# EAGLE board OpenBook_board_final (EAGLE 9.7.0)
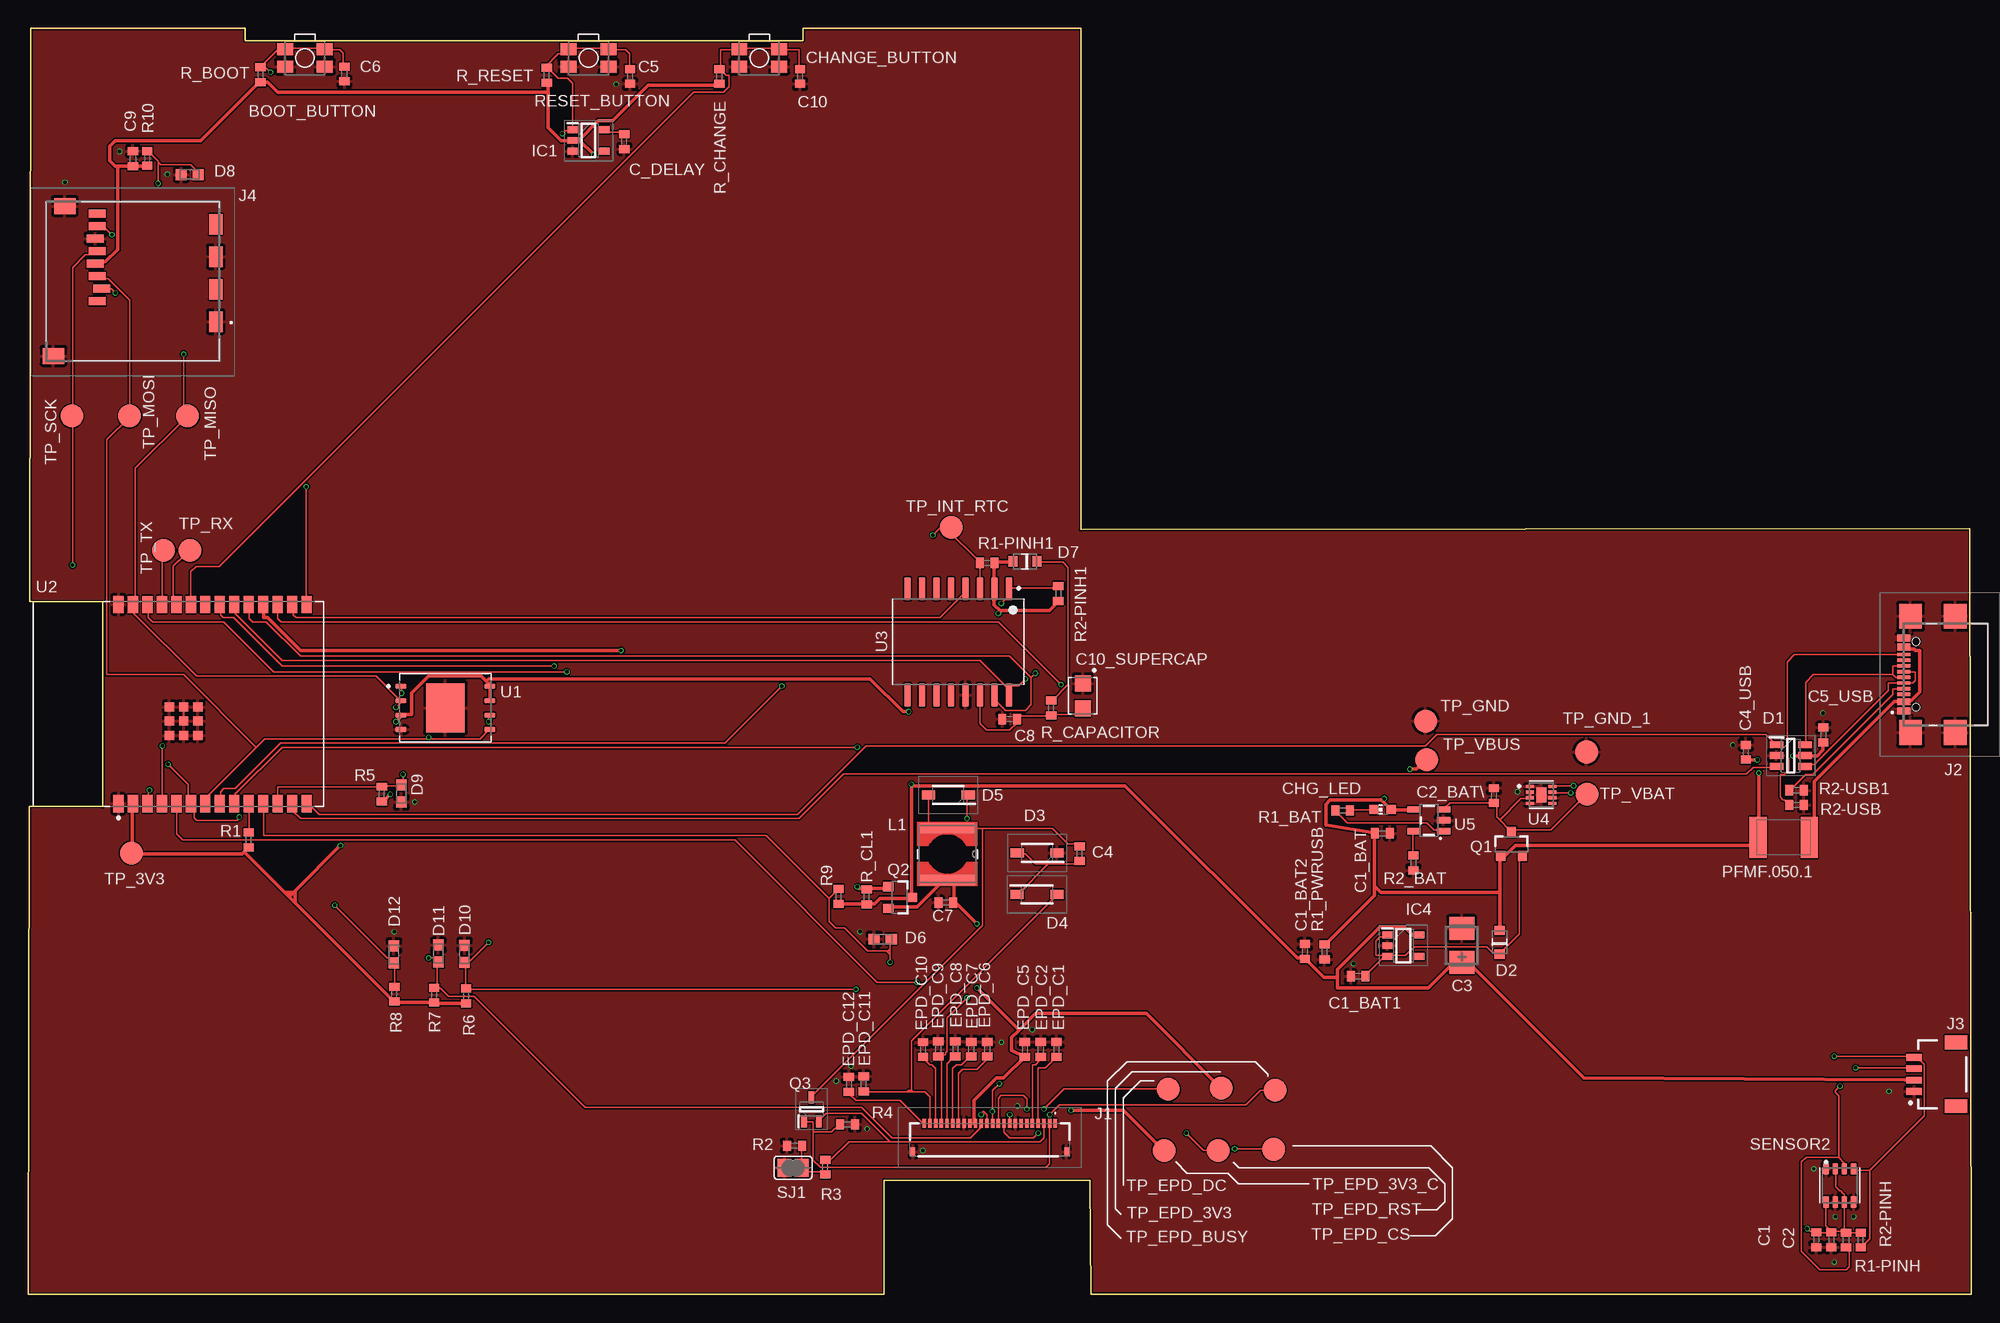
[diagram p0: board, top side]
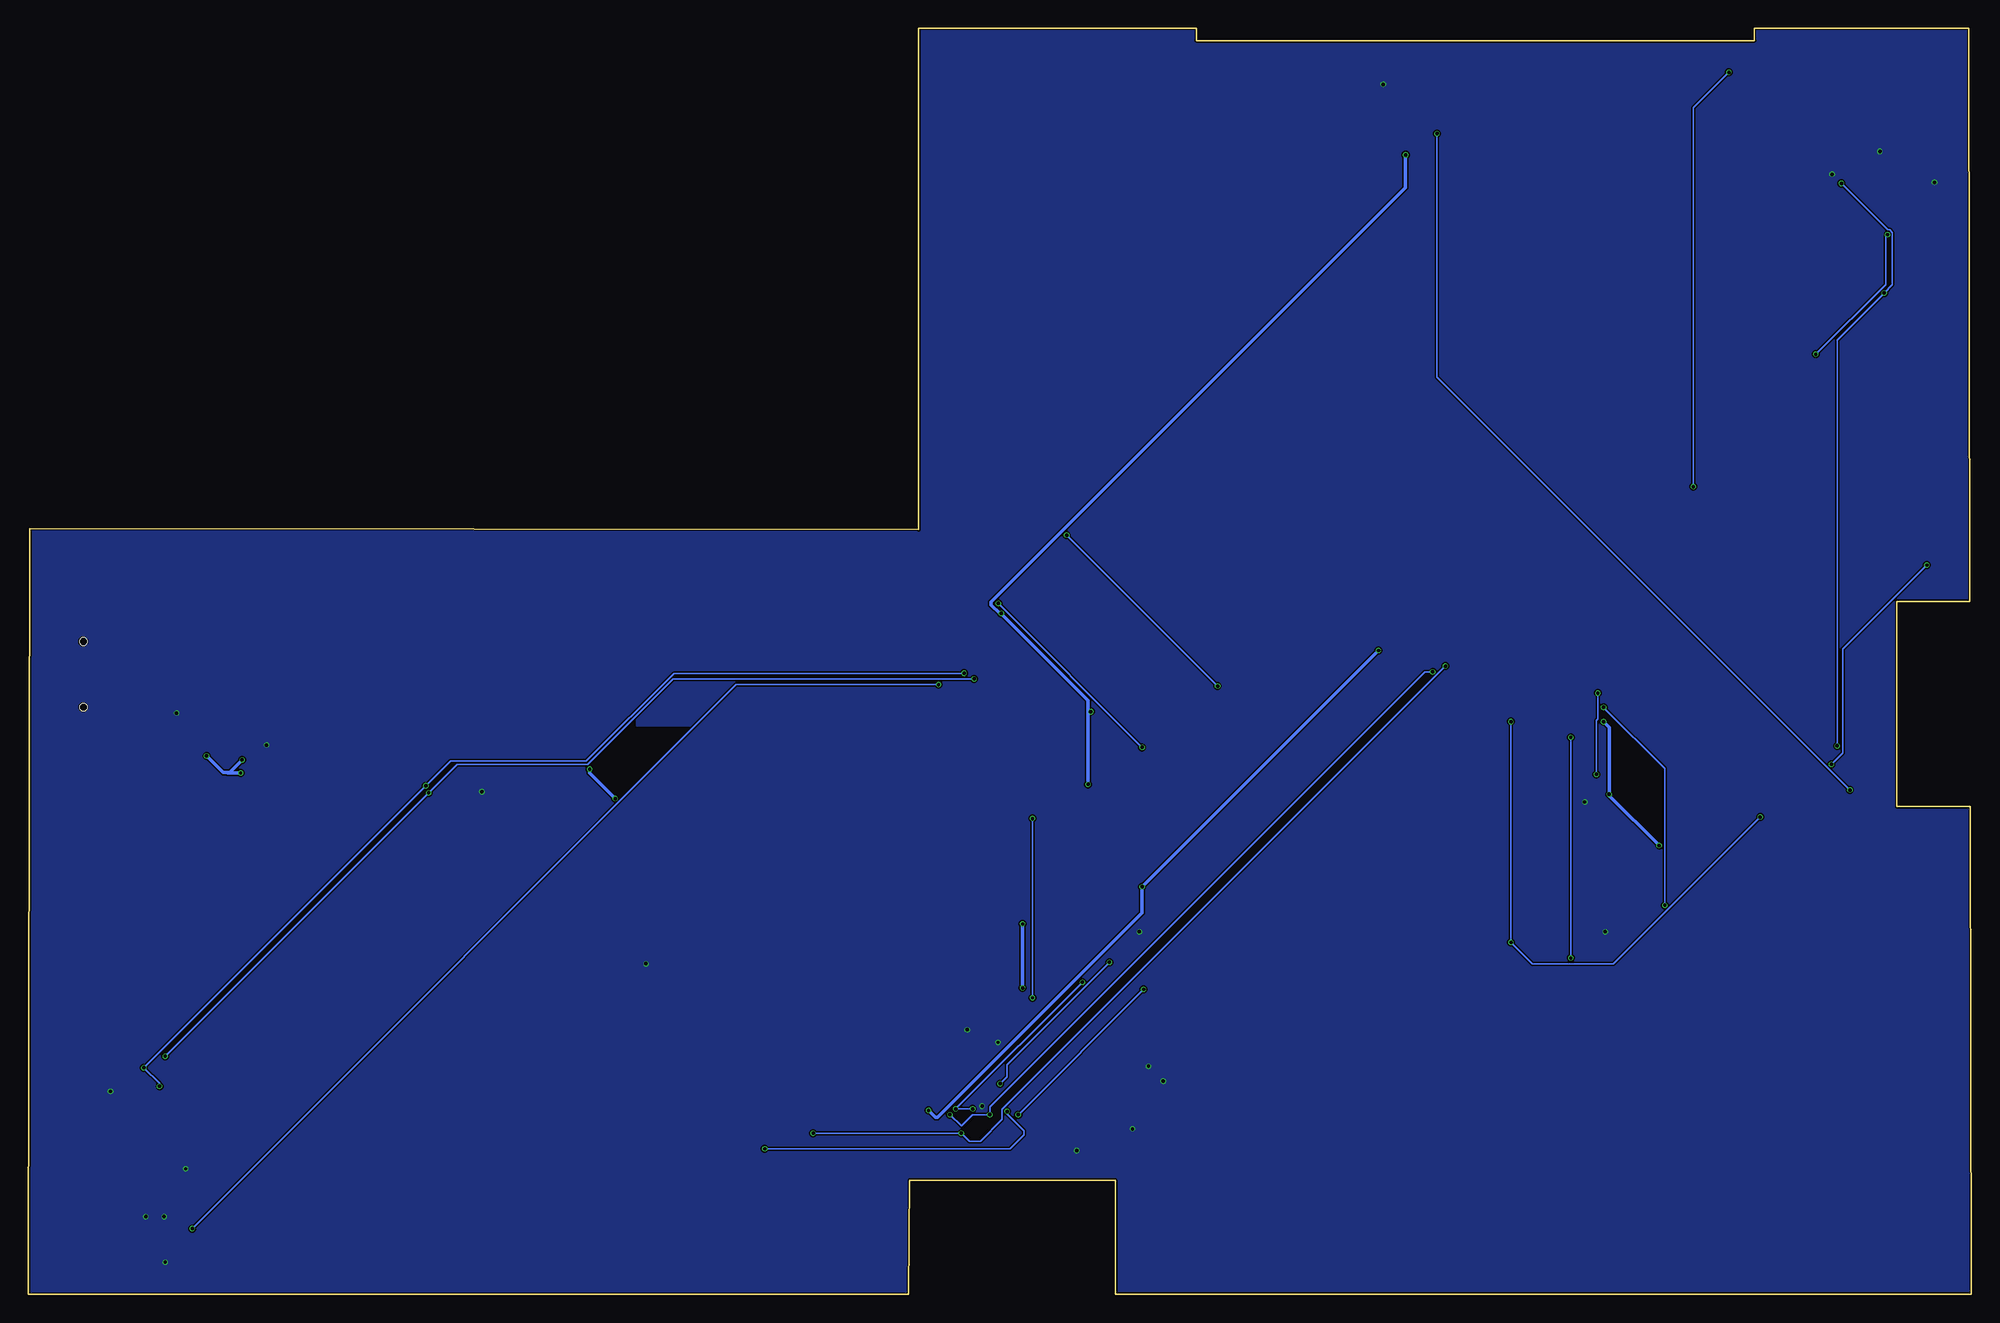
[diagram p1: board, bottom side, seen from below]

Size 170.5 x 111.1 mm. Coordinates in mm from the lower left corner, seen from the top.
Outline: 75.1,10 75.1,0 0,0 0.08,42.8 6.5,42.8 6.5,60.79 0.11,60.79 0.2,111.1 19,111.1 19,110.04 68,110.04 68,111.1 92.36,111.1 92.36,67.1 170.4,67.2 170.5,0 93.27,0 93.17,10 75.1,10
Copper layers (1*16): Top 0.035mm / dielectric 1.6mm / Bottom 0.035mm
Design rules "jlcpcb-2layers.dru *": minimum track width 0.15mm, minimum drill 0.3mm, track to track 5mil, track to pad 5mil, pad to pad 5mil, via to via 5mil, smd to smd 5mil, copper to edge 0.1mm, drill to drill 0.2mm, minimum pad ring 10mil, minimum via ring 3mil, stop-mask expansion 4mil, vias tented up to drill 0mil, thermal gap 10mil
Net classes: 1 POWER: width 0.3 mm

## Footprints (pad centres in the part's own frame; a part is rotated, then mirrored left to right if it is on the bottom)
MYBUTTON = smd 1.4 x 1.05: 1 1.75,0.75; 2 -1.75,0.75; 3 -1.75,-0.75; 4 1.75,-0.75
ESP32_WROVER_EAGLE-LTSPICE_C0402 = smd 0.7 x 0.9: 1 -0.65,0; 2 0.65,0
RCL_CT3528 = smd 2 x 2.2: + -1.5,0; - 1.5,0
CAPCP3225X100N = smd 1.4 x 1.4: 1 -1.1,0; 2 1.1,0
ADAFRUIT_CHIP-LED0603 = smd 0.8 x 0.8: A 0,-0.75; C 0,0.75
SOT95P280X145-6N = smd 1.2 x 0.6: 1 -1.25,0.95; 2 -1.25,0; 3 -1.25,-0.95; 4 1.25,-0.95; 5 1.25,0; 6 1.25,0.95
ESP32_WROVER_AVX---SD0805S020S1R0_AVX_SD0805S020S1R0_0 = smd 0.8 x 0.9: 1 -1.05,0; 2 1.05,0
SOD3716X135N = smd 1.15 x 0.8: 1 -1.75,0; 2 1.75,0
DIOC1608X36N = smd 0.97 x 0.94: 1 -0.75,0; 2 0.75,0
SOT95P280X125-5N = smd 0.9 x 0.6: 1 -1.4,0.95; 2 -1.4,0; 3 -1.4,-0.95; 4 1.4,-0.95; 5 1.4,0.95
SOT95P280X120-5N = smd 0.9 x 0.6: 1 -1.4,0.95; 2 -1.4,0; 3 -1.4,-0.95; 4 1.4,-0.95; 5 1.4,0.95
FH34SRJ24S05SH99 = smd 0.3 x 0.8: 1 5.75,1.45; 2 5.25,1.45; 3 4.75,1.45; 4 4.25,1.45; 5 3.75,1.45; 6 3.25,1.45; 7 2.75,1.45; 8 2.25,1.45; 9 1.75,1.45; 10 1.25,1.45; 11 0.75,1.45; 12 0.25,1.45; 13 -0.25,1.45; 14 -0.75,1.45; 15 -1.25,1.45; 16 -1.75,1.45; 17 -2.25,1.45; 18 -2.75,1.45; 19 -3.25,1.45; 20 -3.75,1.45; 21 -4.25,1.45; 22 -4.75,1.45; 23 -5.25,1.45; 24 -5.75,1.45 | smd 0.4 x 0.8: MP1 6.75,-1.05; MP2 -6.75,-1.05
SAMACSYS_PARTS_USB4110GFA = smd 0.3 x 1.15: A1 -3.35,3.678; A4 -2.55,3.678; A5 -1.25,3.678; A6 -0.25,3.678; A7 0.25,3.678; A8 1.25,3.678; A9 2.55,3.678; A12 3.35,3.678; B1 3.05,3.678; B4 2.25,3.678; B5 1.75,3.678; B6 0.75,3.678; B7 -0.75,3.678; B8 -1.75,3.678; B9 -2.25,3.678; B12 -3.05,3.678 | smd 2.18 x 2: MP1 -5.11,-0.827; MP2 5.11,-0.827; MP3 -5.11,3.103; MP4 5.11,3.103 | hole 0.65: -2.89,2.603; 2.89,2.603
JST04_1MM_RA = smd 0.6 x 1.35: 1 -1.5,0; 2 -0.5,0; 3 0.5,0; 4 1.5,0 | smd 1.2 x 2: NC1 2.8,-3.675; NC2 -2.8,-3.675
112ATAARR03ATTEND = smd 1.8 x 1.2: G1 10.6,10.4; G2 4.9,10.4; S1 7.75,10.4; S2 2.05,10.4 | smd 1.4 x 1.9: G3 13.6,-3.85; G4 0.45,-2.85 | smd 0.7 x 1.5: P1 8.8,0; P2 7.7,0.4; P3 6.6,0; P4 5.5,-0.2; P5 4.4,0; P6 3.3,-0.2; P7 2.2,0; P8 1.1,0
IND_4828-WE-TPC_WRE = smd 0.889 x 4.826: 1 -2.286,0; 2 2.286,0
ESP32C6_VARISTOR_CT/CN1812 = smd 1.5 x 3.6: 1 -2.25,0; 2 2.25,0
ESP32_WROVER_SPARKFUN-DISCRETESEMI_SOT23-3 = smd 0.8 x 0.9: 1 -0.95,-1; 2 0.95,-1; 3 0,1.1
SOT65P210X110-3N = smd 1.05 x 0.5: 1 -1.05,0.65; 2 -1.05,-0.65; 3 1.05,0
ESP32_WROVER_EAGLE-LTSPICE_R0402 = smd 0.7 x 0.9: 1 -0.65,0; 2 0.65,0
ESP32_WROVER_BME680_PSON80P300X300X100-8N = smd 1.016 x 0.5: 1 1.458,1.2; 2 1.458,0.4; 3 1.458,-0.4; 4 1.458,-1.2; 5 -1.458,-1.22; 6 -1.458,-0.4; 7 -1.458,0.4; 8 -1.458,1.2
SJ = smd 1.168 x 1.6: 1 -0.762,0; 2 0.762,0
TP20R = smd 2 x 2: TP 0,0
SON127P600X800X80-9N = smd 0.94 x 0.44: 1 -3.895,1.905; 2 -3.895,0.635; 3 -3.895,-0.635; 4 -3.895,-1.905; 5 3.895,-1.905; 6 3.895,-0.635; 7 3.895,0.635; 8 3.895,1.905 | smd 3.4 x 4.3: 9 0,0
XCVR_ESP32-C6-WROOM-1-N8 = smd 1.5 x 0.9: 1 -8.75,5.26; 2 -8.75,3.99; 3 -8.75,2.72; 4 -8.75,1.45; 5 -8.75,0.18; 6 -8.75,-1.09; 7 -8.75,-2.36; 8 -8.75,-3.63; 9 -8.75,-4.9; 10 -8.75,-6.17; 11 -8.75,-7.44; 12 -8.75,-8.71; 13 -8.75,-9.98; 14 -8.75,-11.25; 15 8.75,-11.25; 16 8.75,-9.98; 17 8.75,-8.71; 18 8.75,-7.44; 19 8.75,-6.17; 20 8.75,-4.9; 21 8.75,-3.63; 22 8.75,-2.36; 23 8.75,-1.09; 24 8.75,0.18; 25 8.75,1.45; 26 8.75,2.72; 27 8.75,3.99; 28 8.75,5.26 | smd 0.8 x 0.8: 29_1 -2.755,0.79; 29_2 -1.505,0.79; 29_3 -0.255,0.79; 29_4 -2.755,-0.46; 29_5 -1.505,-0.46; 29_6 -0.255,-0.46; 29_7 -2.755,-1.71; 29_8 -1.505,-1.71; 29_9 -0.255,-1.71
SOIC127P1032X265-16N = smd 2.05 x 0.59: 1 -4.655,4.445; 2 -4.655,3.175; 3 -4.655,1.905; 4 -4.655,0.635; 5 -4.655,-0.635; 6 -4.655,-1.905; 7 -4.655,-3.175; 8 -4.655,-4.445; 9 4.655,-4.445; 10 4.655,-3.175; 11 4.655,-1.905; 12 4.655,-0.635; 13 4.655,0.635; 14 4.655,1.905; 15 4.655,3.175; 16 4.655,4.445
SON50P200X200X80-9N = smd 0.76 x 0.27: 1 -0.985,0.75; 2 -0.985,0.25; 3 -0.985,-0.25; 4 -0.985,-0.75; 5 0.985,-0.75; 6 0.985,-0.25; 7 0.985,0.25; 8 0.985,0.75 | smd 0.9 x 1.3: 9 0,0
ESP32_WROVER_SPARKFUN-IC-POWER_SOT23-5 = smd 0.55 x 1.2: 1 -0.95,-1.3; 2 0,-1.3; 3 0.95,-1.3; 4 0.95,1.3; 5 -0.95,1.3

## Placement (x,y rotation side)
BOOT_BUTTON  BUTTON_CUSYOMV1  [MYBUTTON]  24.27,108.51 180 top
C1  100nF  [ESP32_WROVER_EAGLE-LTSPICE_C0402]  158.23,4.76 270 top
C1_BAT  4.7uF  [ESP32_WROVER_EAGLE-LTSPICE_C0402]  118.84,40.45 0 top
C1_BAT1  4.7uF  [ESP32_WROVER_EAGLE-LTSPICE_C0402]  116.71,27.91 180 top
C1_BAT2  4.7uF  [ESP32_WROVER_EAGLE-LTSPICE_C0402]  112.03,30.08 90 top
C2  100nF  [ESP32_WROVER_EAGLE-LTSPICE_C0402]  156.93,4.78 270 top
C2_BAT\  4.7uF  [ESP32_WROVER_EAGLE-LTSPICE_C0402]  128.63,43.76 90 top
C3  100uF TANT  [RCL_CT3528]  125.8,30.61 90 top
C4  4.7uF/25V  [ESP32_WROVER_EAGLE-LTSPICE_C0402]  92.26,38.66 90 top
C4_USB  100nF  [ESP32_WROVER_EAGLE-LTSPICE_C0402]  150.73,47.57 90 top
C5  1uF  [ESP32_WROVER_EAGLE-LTSPICE_C0402]  52.81,106.88 270 top
C5_USB  4.7μF  [ESP32_WROVER_EAGLE-LTSPICE_C0402]  157.53,49.08 90 top
C6  100nF  [ESP32_WROVER_EAGLE-LTSPICE_C0402]  27.73,107.1 270 top
C7  10uF  [ESP32_WROVER_EAGLE-LTSPICE_C0402]  80.51,34.37 180 top
C8  100nF  [ESP32_WROVER_EAGLE-LTSPICE_C0402]  86.12,50.47 180 top
C9  100nF  [ESP32_WROVER_EAGLE-LTSPICE_C0402]  9.17,99.66 90 top
C10  100nF  [ESP32_WROVER_EAGLE-LTSPICE_C0402]  67.73,106.88 270 top
C10_SUPERCAP  CPH3225A""  [CAPCP3225X100N]  92.54,52.51 270 top
C_DELAY  100nF  [ESP32_WROVER_EAGLE-LTSPICE_C0402]  52.29,101.17 270 top
CHANGE_BUTTON  BUTTON_CUSYOMV1  [MYBUTTON]  64.14,108.51 180 top
CHG_LED  [ADAFRUIT_CHIP-LED0603]  118.85,42.54 90 top
D1  USBLC6-2SC6Y  [SOT95P280X145-6N]  154.68,47.27 0 top
D2  ESP32_WROVER_AVX---SD0805S020S1R0_AVX_SD0805S020S1R0_0_0AVX_SD0805S020S1R0_0_0  [ESP32_WROVER_AVX---SD0805S020S1R0_AVX_SD0805S020S1R0_0]  129.12,30.89 90 top
D3  MBR0530  [SOD3716X135N]  88.54,38.73 180 top
D4  MBR0530  [SOD3716X135N]  88.52,35.08 0 top
D5  MBR0530  [SOD3716X135N]  80.74,43.82 180 top
D6  PGB1010603MR  [DIOC1608X36N]  74.98,31.17 0 top
D7  ESP32_WROVER_AVX---SD0805S020S1R0_AVX_SD0805S020S1R0_0_0AVX_SD0805S020S1R0_0_0  [ESP32_WROVER_AVX---SD0805S020S1R0_AVX_SD0805S020S1R0_0]  87.46,64.32 180 top
D8  PGB1010603MR  [DIOC1608X36N]  14.16,98.27 0 top
D9  PGB1010603MR  [DIOC1608X36N]  32.73,43.94 90 top
D10  PGB1010603MR  [DIOC1608X36N]  38.27,29.88 270 top
D11  PGB1010603MR  [DIOC1608X36N]  35.97,29.9 270 top
D12  PGB1010603MR  [DIOC1608X36N]  32.07,29.82 270 top
EPD_C1  1uF/50V  [ESP32_WROVER_EAGLE-LTSPICE_C0402]  90.23,21.49 90 top
EPD_C2  1uF/50V  [ESP32_WROVER_EAGLE-LTSPICE_C0402]  88.85,21.48 90 top
EPD_C5  1uF/50V  [ESP32_WROVER_EAGLE-LTSPICE_C0402]  87.45,21.49 90 top
EPD_C6  1uF/50V  [ESP32_WROVER_EAGLE-LTSPICE_C0402]  84.15,21.5 90 top
EPD_C7  1uF/50V  [ESP32_WROVER_EAGLE-LTSPICE_C0402]  82.75,21.51 90 top
EPD_C8  1uF/50V  [ESP32_WROVER_EAGLE-LTSPICE_C0402]  81.35,21.52 90 top
EPD_C9  1uF/50V  [ESP32_WROVER_EAGLE-LTSPICE_C0402]  79.85,21.53 90 top
EPD_C10  1uF/50V  [ESP32_WROVER_EAGLE-LTSPICE_C0402]  78.51,21.47 90 top
EPD_C11  1uF/50V  [ESP32_WROVER_EAGLE-LTSPICE_C0402]  73.31,18.45 90 top
EPD_C12  1uF/50V  [ESP32_WROVER_EAGLE-LTSPICE_C0402]  72.01,18.41 90 top
IC1  BD5229G-TR""  [SOT95P280X125-5N]  49.15,101.27 0 top
IC4  XC6220A331MR-G  [SOT95P280X120-5N]  120.68,30.59 0 top
J1  FH34SRJ-24S-0.5SH_99_  [FH34SRJ24S05SH99]  84.37,13.54 0 top
J2  SAMACSYS_PARTS_USB4110-GF-A  [SAMACSYS_PARTS_USB4110GFA]  168.29,54.4 90 top
J3  QWIIC_RIGHT_ANGLE  [JST04_1MM_RA]  165.5,19.29 90 top
J4  112A-TAAR-R03_ATTEND""  [112ATAARR03ATTEND]  6.04,95.95 270 top
L1  68uH  [IND_4828-WE-TPC_WRE]  80.65,38.63 270 top
PFMF.050.1  ESP32C6_VARISTORCN1812  [ESP32C6_VARISTOR_CT/CN1812]  154.06,40.1 180 top
Q1  20V/4.2A/52mΩ/1.4W  [ESP32_WROVER_SPARKFUN-DISCRETESEMI_SOT23-3]  130.16,39.46 0 top
Q2  20V/4.2A/52mΩ/1.4W  [ESP32_WROVER_SPARKFUN-DISCRETESEMI_SOT23-3]  76.46,34.82 270 top
Q3  SI1308EDL-T1-GE3  [SOT65P210X110-3N]  68.72,16.23 90 top
R1  10K  [ESP32_WROVER_EAGLE-LTSPICE_R0402]  19.33,39.87 270 top
R1-PINH  10K  [ESP32_WROVER_EAGLE-LTSPICE_R0402]  159.53,4.74 90 top
R1-PINH1  10K  [ESP32_WROVER_EAGLE-LTSPICE_R0402]  84.15,64.19 0 top
R1_BAT  200  [ESP32_WROVER_EAGLE-LTSPICE_R0402]  115.35,42.45 0 top
R1_PWRUSB  100K  [ESP32_WROVER_EAGLE-LTSPICE_R0402]  113.76,30.05 90 top
R2  2.2  [ESP32_WROVER_EAGLE-LTSPICE_R0402]  67.23,13.01 0 top
R2-PINH  10K  [ESP32_WROVER_EAGLE-LTSPICE_R0402]  160.83,4.75 90 top
R2-PINH1  10K  [ESP32_WROVER_EAGLE-LTSPICE_R0402]  90.39,61.51 270 top
R2-USB  5k1  [ESP32_WROVER_EAGLE-LTSPICE_R0402]  155.18,42.93 0 top
R2-USB1  5k1  [ESP32_WROVER_EAGLE-LTSPICE_R0402]  155.18,44.23 180 top
R2_BAT  2K  [ESP32_WROVER_EAGLE-LTSPICE_R0402]  121.55,37.86 90 top
R3  10K  [ESP32_WROVER_EAGLE-LTSPICE_R0402]  69.93,11.15 270 top
R4  10K  [ESP32_WROVER_EAGLE-LTSPICE_R0402]  71.89,14.91 0 top
R5  10K  [ESP32_WROVER_EAGLE-LTSPICE_R0402]  31.01,43.89 270 top
R6  10K  [ESP32_WROVER_EAGLE-LTSPICE_R0402]  38.41,26.17 270 top
R7  10K  [ESP32_WROVER_EAGLE-LTSPICE_R0402]  35.61,26.25 270 top
R8  10K  [ESP32_WROVER_EAGLE-LTSPICE_R0402]  32.11,26.33 270 top
R9  10K  [ESP32_WROVER_EAGLE-LTSPICE_R0402]  71.11,34.91 270 top
R10  10K  [ESP32_WROVER_EAGLE-LTSPICE_R0402]  10.43,99.69 270 top
R_BOOT  10K  [ESP32_WROVER_EAGLE-LTSPICE_R0402]  20.37,107.05 270 top
R_CAPACITOR  15  [ESP32_WROVER_EAGLE-LTSPICE_R0402]  89.76,51.45 90 top
R_CHANGE  10K  [ESP32_WROVER_EAGLE-LTSPICE_R0402]  60.64,106.88 270 top
R_CL1  10K  [ESP32_WROVER_EAGLE-LTSPICE_R0402]  73.57,34.86 90 top
R_RESET  10K  [ESP32_WROVER_EAGLE-LTSPICE_R0402]  45.49,106.99 270 top
RESET_BUTTON  BUTTON_CUSYOMV1  [MYBUTTON]  49.15,108.51 180 top
SENSOR2  ESP32_WROVER_BME680_BME680""  [ESP32_WROVER_BME680_PSON80P300X300X100-8N]  158.98,9.54 90 top
SJ1  [SJ]  67.11,11.09 0 top
TP_3V3  TPTP20R  [TP20R]  9.03,38.71 0 top
TP_EPD_3V3  TPTP20R  [TP20R]  104.69,18.09 0 top
TP_EPD_3V3_C  TPTP20R  [TP20R]  99.68,12.61 0 top
TP_EPD_BUSY  TPTP20R  [TP20R]  109.42,17.89 0 top
TP_EPD_CS  TPTP20R  [TP20R]  109.28,12.71 0 top
TP_EPD_DC  TPTP20R  [TP20R]  100.04,17.99 0 top
TP_EPD_RST  TPTP20R  [TP20R]  104.43,12.61 0 top
TP_GND  TPTP20R  [TP20R]  122.62,50.29 0 top
TP_GND_1  TPTP20R  [TP20R]  136.74,47.59 0 top
TP_INT_RTC  TPTP20R  [TP20R]  80.98,67.31 0 top
TP_MISO  TPTP20R  [TP20R]  13.96,77.09 0 top
TP_MOSI  TPTP20R  [TP20R]  8.88,77.09 0 top
TP_RX  TPTP20R  [TP20R]  14.18,65.29 0 top
TP_SCK  TPTP20R  [TP20R]  3.8,77.09 0 top
TP_TX  TPTP20R  [TP20R]  11.86,65.29 0 top
TP_VBAT  TPTP20R  [TP20R]  136.8,43.89 0 top
TP_VBUS  TPTP20R  [TP20R]  122.73,46.91 0 top
U1  W25Q512JVEIQ  [SON127P600X800X80-9N]  36.59,51.46 0 top
U2  ESP32-C6-WROOM-1-N8""  [XCVR_ESP32-C6-WROOM-1-N8]  13.16,51.8 90 top
U3  DS3231SN#""  [SOIC127P1032X265-16N]  81.6,57.25 270 top
U4  MAX17048G+T10  [SON50P200X200X80-9N]  132.78,43.82 0 top
U5  MCP73831  [ESP32_WROVER_SPARKFUN-IC-POWER_SOT23-5]  122.91,41.59 90 top

## Library data of the parts
BOOT_BUTTON C1 C1_BAT C1_BAT1 C1_BAT2 C2 C2_BAT\ C3 C4 C4_USB C5 C5_USB C6-C10 C10_SUPERCAP C_DELAY CHANGE_BUTTON CHG_LED D1-D12 EPD_C1 EPD_C2 EPD_C5-EPD_C12 IC1 IC4 J1-J4 L1 PFMF.050.1 Q3 R1 R1-PINH R1-PINH1 R1_BAT R1_PWRUSB R2 R2-PINH R2-PINH1 R2-USB R2-USB1 R2_BAT R3-R10 R_BOOT R_CAPACITOR R_CHANGE R_CL1 R_RESET RESET_BUTTON SENSOR2 SJ1 TP_3V3 TP_EPD_3V3 TP_EPD_3V3_C TP_EPD_BUSY TP_EPD_CS TP_EPD_DC TP_EPD_RST TP_GND TP_GND_1 TP_INT_RTC TP_MISO TP_MOSI TP_RX TP_SCK TP_TX TP_VBAT TP_VBUS U1-U5 = openbook schematic
Q1 Q2 = openbook schematic; PARTNAME: DMG2305UX-7

## Nets
3V3 [POWER]: C1_BAT2.1 C3.+ C9.1 D7.2 IC1.2 IC4.5 J3.2 J4.P4 Q2.3 R1-PINH1.2 R1.2 R2-PINH1.2 R5.2 R6.2 R7.2 R8.2 R9.2 R10.2 R_BOOT.2 R_CHANGE.2 R_CL1.1 R_RESET.2 TP_3V3.TP U1.3 U1.7 U1.8 U2.2 U3.2
32KHZ: R2-PINH1.1 U2.9 U3.1
DN: D1.4 J2.A7 J2.B7
DP: D1.6 J2.A6 J2.B6
EPD_3V3 [POWER]: C7.1 EPD_C5.1 J1.15 J1.16 L1.2 Q2.2 TP_EPD_3V3.TP
EPD_3V3_C [POWER]: Q2.1 R_CL1.2 TP_EPD_3V3_C.TP U2.18
EPD_BUSY: J1.9 TP_EPD_BUSY.TP U2.26
EPD_CS: D6.2 J1.12 R9.1 TP_EPD_CS.TP U2.11
EPD_DC: J1.11 TP_EPD_DC.TP U2.5
EPD_RST: J1.10 TP_EPD_RST.TP U2.21
FLASH_CS: D9.2 R5.1 U1.1 U2.12
GDR: J1.2 Q3.1 R4.1
GND: BOOT_BUTTON.1 BOOT_BUTTON.2 C1.2 C1_BAT1.2 C1_BAT2.2 C1_BAT.2 C2.2 C2_BAT\.2 C3.- C4_USB.2 C5.2 C5_USB.2 C6.2 C7.2 C8.2 C9.2 C10.2 C10_SUPERCAP.1 C_DELAY.2 CHANGE_BUTTON.1 CHANGE_BUTTON.2 D1.2 D3.1 D6.1 D8.1 D9.1 D10.1 D11.1 D12.1 EPD_C1.2 EPD_C2.2 EPD_C5.2 EPD_C6.2 EPD_C7.2 EPD_C8.2 EPD_C9.2 EPD_C10.2 EPD_C11.2 EPD_C12.2 IC1.3 IC4.2 J1.8 J1.17 J1.MP1 J1.MP2 J2.A1 J2.A12 J2.B1 J2.B12 J2.MP1 J2.MP2 J2.MP3 J2.MP4 J3.1 J4.G1 J4.G2 J4.G3 J4.G4 J4.P6 R1_PWRUSB.1 R2-USB1.1 R2-USB.2 R2.1 R2_BAT.1 R4.2 RESET_BUTTON.1 RESET_BUTTON.2 SENSOR2.1 SENSOR2.5 SENSOR2.7 SJ1.1 TP_GND.TP TP_GND_1.TP U1.4 U1.9 U2.1 U2.28 U2.29_1 U2.29_2 U2.29_3 U2.29_4 U2.29_5 U2.29_6 U2.29_7 U2.29_8 U2.29_9 U3.13 U4.1 U4.4 U4.6 U4.9 U5.2
I2C_PW: C1.1 C2.1 R1-PINH.2 R2-PINH.2 SENSOR2.2 SENSOR2.6 SENSOR2.8 U2.17
INT_RTC: R1-PINH1.1 TP_INT_RTC.TP U2.8 U3.3
IO/BOOT: BOOT_BUTTON.3 BOOT_BUTTON.4 C6.1 R_BOOT.1 U2.15
IO/CHANGE: C10.1 CHANGE_BUTTON.3 CHANGE_BUTTON.4 R_CHANGE.1 U2.23
MISO: D12.2 J4.P7 R8.1 TP_MISO.TP U1.2 U2.27
MOSI: D11.2 J1.14 J4.P3 R7.1 TP_MOSI.TP U1.5 U2.7
N$1: J2.B5 R2-USB.1
N$2: C1_BAT1.1 D2.1 IC4.1 IC4.3 Q1.2
N$3: R1.1 U2.10
N$4: D7.1 R_CAPACITOR.2
N$5: EPD_C1.1 J1.4
N$6: J2.A5 R2-USB1.2
N$7: EPD_C2.1 J1.5
N$8: EPD_C6.1 J1.18
N$9: EPD_C7.1 J1.19
N$10: EPD_C8.1 J1.20
N$11: C_DELAY.1 IC1.5
N$12: EPD_C10.1 J1.22
N$13: C4.1 D3.2 D4.1
N$14: EPD_C12.1 J1.24
N$15: R1_BAT.1 U5.1
N$16: CHG_LED.C R1_BAT.2
N$18: R2_BAT.2 U5.5
PREVGH: D5.1 EPD_C9.1 J1.21
PREVGL: D4.2 EPD_C11.1 J1.23
RESE: J1.3 Q3.2 R3.1
RESE': R2.2 R3.2 SJ1.2
RESET: C5.1 IC1.1 R_RESET.1 RESET_BUTTON.3 RESET_BUTTON.4 U2.3
RTC_RST: U2.16 U3.4
RX: TP_RX.TP U2.24
SCK: D10.2 J1.13 J4.P5 R6.1 TP_SCK.TP U1.6 U2.6
SCL: J3.4 R2-PINH.1 SENSOR2.4 U2.20 U3.16 U4.7
SDA: J3.3 R1-PINH.1 SENSOR2.3 U2.19 U3.15 U4.8
SRC: C4.2 D5.2 L1.1 Q3.3
SS_SD: D8.2 J4.P2 R10.1 U2.4
TX: TP_TX.TP U2.25
USB_D+: D1.1 U2.14
USB_D-: D1.3 U2.13
VBAT: C2_BAT\.1 Q1.3 TP_VBAT.TP U4.2 U4.3 U5.3
VBUS [POWER]: C1_BAT.1 C4_USB.1 C5_USB.1 CHG_LED.A D1.5 D2.2 PFMF.050.1.2 Q1.1 R1_PWRUSB.2 TP_VBUS.TP U5.4
VRTC: C8.1 C10_SUPERCAP.2 R_CAPACITOR.1 U3.14
VUSB [POWER]: J2.A4 J2.A9 J2.B4 J2.B9 PFMF.050.1.1

## Tracks (layer width: path | path; a pad name or v marks a point on that pad's centre or on a via)
3V3  (via drill 0.3)
  Top 0.3: 45.62,105.5 45.62,106.25 45.5,106.25 R_RESET.2 | 45.62,105.5 45.62,102.38 46.75,101.25 47.75,101.25 IC1.2 47.88,101.25 48.25,101.25 48.31,101.31 | 48.31,101.31 50,103 51.25,103 54.38,106.12 60.62,106.12 R_CHANGE.2 | R10.2 10.38,99 9.25,99 C9.1 9.16,99.03 7.83,99.03 | 7.83,99.03 7.6,99.03 7.12,99.5 7.12,100.78 7.6,101.25 15.12,101.25 20.25,106.38 R_BOOT.2 20.5,106.38 21,106.38 21.88,105.5 45.62,105.5 | 7.83,99.03 7.83,91.7 6.75,90.62 6,90.62 5.88,90.5 J4.P4 | U1.7 40.5,52.12 40.5,53.25 U1.8 40.5,53.5 40.19,53.81 | v31.75,43.88 31.12,43.25 R5.2 | v32.25,50.25 32.75,50.75 U1.3 32.75,50.88 33.62,50.88 33.62,52.75 35.12,54.25 39.75,54.25 40.19,53.81 | R6.2 38.38,25.5 35.62,25.5 R7.2 35.5,25.62 32.12,25.62 R8.2 32,25.75 23.4,34.35 | 18.94,38.81 18.75,38.62 9.12,38.62 TP_3V3.TP 9.12,38.75 9.12,43 U2.2 | 18.94,38.81 19.25,39.12 R1.2 | 18.94,38.81 22.48,35.27 | 22.48,35.27 22.81,34.94 | 22.81,34.94 23.4,34.35 | 23.27,35.27 23,35 22.88,35 22.81,34.94 | 23.4,35.4 v27.38,39.38 | R9.2 71.12,34.25 73.5,34.25 R_CL1.1 73.62,34.25 74.25,34.25 74.75,34.75 77.5,34.75 Q2.3 77.5,34.88 v77.5,44.75 77.62,44.62 96.25,44.62 111.38,29.5 112,29.5 C1_BAT2.1 112.12,29.38 113.7,27.8 114.88,27.8 | D7.2 86.38,64.25 84.88,64.25 R1-PINH1.2 84.75,64.12 84.75,62 U3.2 84.75,61.88 84.75,60.5 85.25,60 | 85.25,60 89.62,60 90.38,60.75 R2-PINH1.2 | v85.12,59.75 85.25,59.88 85.25,60 | IC4.5 122,31.5 121.5,31.5 120.75,32.25 118.62,32.25 114.88,28.5 114.88,27.8 | J3.2 164.7,18.79 136.5,19 126.5,29 125.88,29 C3.+ 125.75,29 125,29 122.88,26.88 114.88,26.88 114.88,27.8 | 40.19,53.81 40.38,54 73.88,54 76.75,51.12 v77.25,51.12
  Top 0.3: v49.62,100 48.31,101.31 | 22.48,35.27 23.27,35.27 | 23.27,35.27 23.4,35.4 | 23.4,34.35 23.4,35.4
  Bottom 0.3: v32.25,50.25 31.75,49.75 v31.75,43.88 31.75,43.75 v27.38,39.38 | 77.5,51.12 77.5,52.12 v85.12,59.75 85.25,59.75 86,60.5 86,60.75 49.62,97.12 v49.62,100 | 77.5,51.12 v77.5,44.75 | v77.25,51.12 77.5,51.12
32KHZ  (via drill 0.3)
  Top 0.15: R2-PINH1.1 90.38,62.12 90.25,62 86.12,62 U3.1 86,61.88 86,61.25 v85.38,60.62 | v72.75,48 22.25,48 18.25,44 18.12,44 18.12,43.12 U2.9
  Bottom 0.15: v85.38,60.62 v72.75,48
DN
  Top 0.15: J2.A7 164.62,54.62 165.62,54.62 165.62,53.88 165.38,53.62 164.62,53.62 J2.B7 164.5,53.62 163.25,53.62 163.25,53 156.75,46.5 156.12,46.5 156,46.38 D1.4
DP
  Top 0.15: 163.62,54.38 163.88,54.12 164.5,54.12 J2.A6 | 163.62,54.38 163.62,55.12 164.5,55.12 J2.B6 | 163.62,54.38 156.68,54.38 156,53.7 156,48.25 D1.6
EPD_3V3  (via drill 0.3)
  Top 0.3: Q2.2 75.5,33.88 75.62,34 78,34 80.25,36.25 80.62,36.25 L1.2 80.62,36.12 81.25,36.12 81.25,34.38 C7.1 81.38,34.38 v83.25,32.5 | J1.16 83,15 J1.15 83,15.12 83,17 84.97,18.97 85.58,18.97 EPD_C5.1 86.28,21.39 | 86.88,23.12 86.28,22.52 86.28,21.39 | 86.88,23.12 88.38,24.62 98.12,24.62 104.62,18.12 TP_EPD_3V3.TP | 86.28,21.39 | v83.25,26.88 86.88,23.25 86.88,23.12
  Bottom 0.3: v83.25,26.88 v83.25,32.5
EPD_3V3_C  (via drill 0.3)
  Top 0.3: Q2.1 75.38,35.75 75.25,35.62 73.62,35.62 R_CL1.2 73.5,35.62 72.88,35.62 v72.75,35.75 | v52,56.5 23.88,56.5 21,59.38 20.62,59.38 20.62,60.5 U2.18 | v91.5,16.12 96.12,16.12 99.62,12.62 TP_EPD_3V3_C.TP
  Bottom 0.3: v52,56.5 v72.75,35.75 72.75,33.48 90.7,15.53 90.9,15.53 v91.5,16.12
EPD_BUSY  (via drill 0.3)
  Top 0.15: v86.12,15.75 J1.9 | v89.62,15.75 90.5,16.62 106.88,16.62 108.12,17.88 109.38,17.88 TP_EPD_BUSY.TP | v47.25,54.62 21.5,54.62 17.12,59 10.9,59 10.5,59.4 10.5,60.5 U2.26
  Bottom 0.15: v89.62,15.75 88.62,14.75 87.62,15.75 v86.12,15.75 86.12,16.45 47.95,54.62 v47.25,54.62
EPD_CS  (via drill 0.3)
  Top 0.15: 84.62,16.05 84.62,17.88 v85.22,18.46 | 75.62,30.3 75.62,31.12 D6.2 | 75.62,30.3 75.62,30.12 | 75.62,30.12 75.62,29.8 | 75.62,29.8 v75.62,29.12 | 70.25,34.75 71,35.5 R9.1 | 70.25,34.75 70.25,32.7 70.83,32.12 71.62,32.12 73.62,30.12 75.3,30.12 | 75.62,30.12 75.45,30.12 | 70.25,34.75 64.75,40.25 20.62,40.25 20.62,43 U2.11 | v105.88,12.75 109.25,12.75 TP_EPD_CS.TP | 84.62,16.05 v84.61,16.04 | J1.12 84.62,16.05 | 75.3,30.12 75.62,29.8 | 75.3,30.12 75.45,30.12 | 75.45,30.12 75.62,30.3
  Bottom 0.15: v75.62,29.12 84.62,20.12 84.62,19.06 v85.22,18.46 | v105.88,12.75 84.34,12.75 83.12,13.97 83.12,14.35 84.61,15.84 v84.61,16.04
EPD_DC  (via drill 0.3)
  Top 0.15: v87.62,16.25 87.62,17.15 87.33,17.45 85.38,17.45 85.12,17.2 J1.11 | v89.12,16.25 90.88,18 100,18 TP_EPD_DC.TP | v78,27.38 74.5,27.38 62,39.88 13.53,39.88 13,40.4 13,43 U2.5
  Bottom 0.15: v87.62,16.25 v89.12,16.25 v78,27.38
EPD_RST  (via drill 0.3)
  Top 0.15: v88.62,14.12 88.22,13.72 86.1,13.72 85.62,14.2 85.62,14.88 J1.10 | v101.62,14.12 103.12,12.62 104.38,12.62 TP_EPD_RST.TP | v46.12,55.12 22.25,55.12 18,59.38 17.1,59.38 16.88,59.6 16.88,60.5 U2.21
  Bottom 0.15: v101.62,14.12 v88.62,14.12 87.92,13.43 86.96,13.43 85.04,15.35 85.04,16.21 v46.12,55.12 | v46.12,55.12
FLASH_CS  (via drill 0.3)
  Top 0.15: v32.75,52.75 32.75,53.25 U1.1 | v32.88,45.62 32.88,44.75 32.75,44.75 D9.2 32.62,44.62 31.12,44.62 R5.1 31,44.5 21.88,44.5 21.88,43.12 U2.12
  Bottom 0.15: v32.75,52.75 32.75,50.5 32.88,50.38 v32.88,45.62
GDR
  Top 0.15: 68.88,14.25 68.88,15.12 68.12,15.12 Q3.1 | 68.88,14.25 68.88,11.75 69.5,11.12 89.3,11.12 89.62,11.45 89.62,14.88 J1.2 | 68.88,14.25 70.5,14.25 71.12,14.88 R4.1
GND  (via drill 0.3)
  Top 0.15: U2.29_5 13.62,50.38 13.62,51.5 U2.29_6
  other vias: 8,100.3 78.5,12.6 130.7,44.1 157.5,51 51.6,106.2 33.9,43.2 3.2,97.6 73,31.8 32.1,31.8 163.3,17.8 156.7,11 158.6,6.8 12.2,98.3 149.6,48.2 70.9,18.7 72.2,20 116.3,29 73.6,14.5 85.4,22.1 158.5,2.8 160.2,6.8 88.1,23.2 86.8,16.5
  pour Top: 6.56,42.76 6.54,42.74 6.52,42.72 0.15,42.72 0.08,0.08 75.02,0.08 75.02,10.02 75.04,10.04 75.06,10.06 75.08,10.08 93.17,10.08 93.18,10.08 93.18,10.08 93.18,10.08 93.2,10.07 93.21,10.07 93.21,10.06 93.21,10.06 93.22,10.05 93.23,10.04 93.23,10.04 93.23,10.04 93.24,10.03 93.25,10.02 93.25,10.02 93.25,10.02 93.25,10 93.34,0.08 170.42,0.08 170.32,67.12 92.38,67.02 92.38,67.02 92.36,67.02 92.35,67.02 92.35,67.02 92.35,67.02 92.34,67.03 92.32,67.04 92.32,67.04 92.32,67.04 92.31,67.05 92.3,67.06 92.3,67.06 92.3,67.06 92.3,67.07 92.29,67.08 92.29,67.08 92.29,67.08 92.29,67.1 92.29,67.12 92.29,67.12 92.29,111.02 68.08,111.02 68.08,110.03 68.06,110 68.04,109.98 68.02,109.97 18.98,109.97 18.96,109.98 18.94,110 18.92,110.03 18.92,111.02 0.28,111.02 0.19,60.86 6.52,60.86 6.54,60.85 6.56,60.83 6.58,60.8 6.58,42.78
  pour Bottom: 6.56,42.76 6.54,42.74 6.52,42.72 0.15,42.72 0.08,0.08 75.02,0.08 75.02,10.02 75.04,10.04 75.06,10.06 75.08,10.08 93.17,10.08 93.18,10.08 93.18,10.08 93.18,10.08 93.2,10.07 93.21,10.07 93.21,10.06 93.21,10.06 93.22,10.05 93.23,10.04 93.23,10.04 93.23,10.04 93.24,10.03 93.25,10.02 93.25,10.02 93.25,10.02 93.25,10 93.34,0.08 170.42,0.08 170.32,67.12 92.38,67.02 92.38,67.02 92.36,67.02 92.35,67.02 92.35,67.02 92.35,67.02 92.34,67.03 92.32,67.04 92.32,67.04 92.32,67.04 92.31,67.05 92.3,67.06 92.3,67.06 92.3,67.06 92.3,67.07 92.29,67.08 92.29,67.08 92.29,67.08 92.29,67.1 92.29,67.12 92.29,67.12 92.29,111.02 68.08,111.02 68.08,110.03 68.06,110 68.04,109.98 68.02,109.97 18.98,109.97 18.96,109.98 18.94,110 18.92,110.03 18.92,111.02 0.28,111.02 0.19,60.86 6.52,60.86 6.54,60.85 6.56,60.83 6.58,60.8 6.58,42.78
  pour Top: 5.18,26.78 29.12,26.78 29.12,72.42 5.58,72.42 5.18,27.8
  pour Top: 65.18,42.68 128.02,42.68 128.02,57.62 65.18,57.62
  pour Top: 71.68,31.48 91.12,31.48 91.12,45.82 71.68,44.93
  pour Top: 63.18,8.08 114.02,8.08 114.02,24.52 63.18,23.33
  pour Top: 17.58,44.48 64.72,44.48 64.72,63.52 17.58,63.82
  pour Top: 32.68,88.98 80.62,88.98 80.42,108.22 32.68,108.22
  pour Top: 24.48,104.78 29.92,104.78 29.92,107.92 24.48,107.92
  pour Top: 82.28,53.68 91.92,53.68 91.92,67.92 82.48,67.92 82.28,54.4
  pour Top: 149.68,36.68 166.42,36.68 166.42,60.92 165.81,60.92 165.81,60.92 165.8,60.92 165.78,60.92 165.78,60.92 149.68,61.32
  pour Bottom: 21.08,34.38 40.42,34.38 40.42,56.12 21.08,55.03
  pour Bottom: 38.88,11.78 92.32,11.78 92.32,47.74 38.88,60.9
  pour Bottom: 83.18,38.38 130.52,38.38 130.52,59.02 127.2,59.02 83.18,58.52
  pour Bottom: 128.98,17.58 164.62,17.58 164.62,46.82 159.71,46.82 159.71,46.82 159.7,46.82 159.68,46.82 159.68,46.83 128.98,50.21
  pour Bottom: 85.48,49.88 117.12,49.88 117.12,59.72 116.1,59.72 85.48,58.03
I2C_PW  (via drill 0.3)
  Top 0.15: R1-PINH.2 159.62,5.38 160.75,5.38 R2-PINH.2 | 159.38,5.5 159.38,8 SENSOR2.6 159.38,8.12 159.38,8.75 159.26,8.86 | 159.38,5.5 159.5,5.5 R1-PINH.2 | 158.62,9.4 158.62,10.88 SENSOR2.2 | 158.25,5.5 157.75,6 157.75,8 SENSOR2.8 | v90.62,53.5 85.12,59 22.18,59 21.88,59.3 21.88,60.5 U2.17 | v156.12,5.75 156.38,5.5 156.88,5.5 C2.1 157,5.38 158.12,5.38 C1.1 158.25,5.5 | 158.25,5.5 159.38,5.5 | 159.38,5.5 R1-PINH.2
  Top 0.152: 158.62,9.4 158.96,9.06 159.06,9.06 159.26,8.86
  Bottom 0.15: v90.62,53.5 108.38,53.5 v156.12,5.75
INT_RTC  (via drill 0.3)
  Top 0.15: U3.3 83.5,62 R1-PINH1.1 83.5,64.25 80.5,67.25 | v66.12,53.38 61.12,48.38 22.12,48.38 18.12,44.38 17.15,44.38 16.88,44.1 16.88,43.12 U2.8 | v79.38,66.62 80,67.25 80.5,67.25 | 80.5,67.25 80.88,67.25 TP_INT_RTC.TP 80.5,67.25
  Bottom 0.15: v79.38,66.62 v66.12,53.38
IO/BOOT  (via drill 0.3)
  Top 0.15: 27.62,108.9 27.62,107.75 C6.1 | 27.3,109.25 26.12,109.25 BOOT_BUTTON.3 26,109.38 22.62,109.38 BOOT_BUTTON.4 22.5,109.25 21.88,109.25 20.38,107.75 R_BOOT.1 20.38,107.62 20.88,107.62 v21.25,107.25 | v24.38,70.88 24.38,60.62 U2.15
  Top 0.152: 27.3,109.25 27.62,108.92 27.62,108.9
  Bottom 0.15: v24.38,70.88 24.38,104.12 v21.25,107.25
IO/CHANGE
  Top 0.15: C10.1 67.62,107.62 67.62,109.25 66,109.25 CHANGE_BUTTON.3 65.88,109.38 62.5,109.38 CHANGE_BUTTON.4 62.38,109.25 60.75,109.25 60.75,107.62 R_CHANGE.1 60.75,107.5 61.25,107 61.5,107 61.5,106 61,105.5 58.38,105.5 16.75,63.88 14.7,63.88 14.25,63.42 U2.23
MISO  (via drill 0.3)
  Top 0.15: v13.62,82.5 13.62,77.12 13.88,77.12 TP_MISO.TP 13.88,77 9.38,72.5 9.38,60.62 9.25,60.62 U2.27 9.25,60.5 9.25,59.75 14.75,54.25 30.5,54.25 32.62,52.12 U1.2 32.75,52 v32.25,51.5 | J4.P7 6.12,93.75 6.38,93.5 6.82,93.5 v7.32,93 | R8.1 32.12,27 32.12,29 D12.2 32,29.12 31.62,29.5 31.5,29.5 v26.88,34.12
  Bottom 0.15: v13.62,82.5 7.5,88.62 7.5,92.82 v7.32,93 | v26.88,34.12 26.88,46.12 v32.25,51.5
MOSI  (via drill 0.3)
  Top 0.15: 35.88,26.88 35.62,26.88 R7.1 35.88,26.88 | 35.88,26.88 36.12,26.88 36.88,26.12 39.12,26.12 48.88,16.38 73.12,16.38 75.78,13.72 82.69,13.72 83.62,14.65 J1.14 | 35.88,26.88 35.88,29.12 D11.2 35.88,29.25 35.62,29.5 v35.12,29.5 | J4.P3 6.12,89.25 6.25,89.12 7,89.12 8.88,87.25 8.88,77.12 TP_MOSI.TP 8.88,77 6.88,75 6.88,54.38 13.62,54.38 20,48 | 35.12,48.75 20.75,48.75 20,48 | 35.12,48.75 39.62,48.75 40.38,49.5 U1.5 | 20,48 15.62,43.62 15.62,43.12 U2.7 | 35.12,48.75 v35.12,48.88
  Bottom 0.15: v35.12,48.88 v35.12,29.5
N$1
  Top 0.15: R2-USB.1 154.5,43 154.12,43.38 154,43.38 153.75,43.62 153.75,45.62 154.12,45.62 154.5,46 154.5,47 154.38,47.12 154.38,55.5 155,56.12 164.5,56.12 J2.B5
N$2
  Top 0.15: C1_BAT1.1 117.38,28 119,29.62 119.25,29.62 IC4.3 | IC4.1 119.25,31.5 119.12,31.38 118.62,31.38 118.25,31 118.25,29.75 119.25,29.75 IC4.3 | 129.25,30 130.88,31.62 130.88,38.38 131,38.38 Q1.2 | 129.25,30 129.12,29.88 D2.1 129.25,30 | 129.25,30 128.5,30 128,30.5 121.62,30.5 120.88,29.75 119.38,29.75 IC4.3
N$3
  Top 0.15: R1.1 19.38,40.62 19.38,43 U2.10
N$4
  Top 0.15: R_CAPACITOR.2 89.88,52.12 91.25,53.5 91.25,63.8 90.8,64.25 88.62,64.25 D7.1
N$5
  Top 0.15: J1.4 88.62,19.88 89.25,19.88 90.12,20.75 EPD_C1.1
N$6
  Top 0.15: R2-USB1.2 154.62,44.25 156,45.62 156.62,45.62 163.62,52.62 163.62,53.12 164.5,53.12 J2.A5
N$7
  Top 0.15: J1.5 88.12,20.12 88.38,20.12 88.75,20.5 88.75,20.75 EPD_C2.1
N$8
  Top 0.15: J1.18 81.62,19.4 81.97,19.75 83.25,19.75 84.25,20.75 EPD_C6.1
N$9
  Top 0.15: J1.19 81.12,19.8 81.45,20.12 81.88,20.12 82.5,20.75 82.75,20.75 EPD_C7.1
N$10
  Top 0.15: J1.20 80.62,20.2 80.9,20.48 80.9,20.62 81.12,20.62 81.25,20.75 EPD_C8.1
N$11
  Top 0.15: IC1.5 50.62,102.12 50.75,102 52.12,102 52.25,101.88 C_DELAY.1
N$12
  Top 0.15: J1.22 79.62,19.8 79.3,20.12 79.12,20.12 78.5,20.75 EPD_C10.1
N$13
  Top 0.15: C4.1 92,37.75 89.5,37.75 | 89.5,37.75 88.38,37.75 87.5,38.62 86.88,38.62 D3.2 | 89.5,37.75 86.88,35.12 D4.1
N$14
  Top 0.15: J1.24 78.5,15 76.5,17 72.62,17 72.12,17.5 72.12,17.75 EPD_C12.1
N$15
  Top 0.15: R1_BAT.1 114.75,42.38 115.75,41.38 122.75,41.38 123.38,40.75 124.12,40.75 U5.1
N$16
  Top 0.15: CHG_LED.C 118,42.5 116,42.5 R1_BAT.2
N$18
  Top 0.15: R2_BAT.2 121.5,38.62 121.5,40.62 U5.5
PREVGH  (via drill 0.3)
  Top 0.15: J1.21 80.12,20.88 79.88,20.88 EPD_C9.1 79.88,21 80.5,21 80.5,21.18 80.62,21.3 80.62,24.25 v82.38,26 | v82.38,41.75 82.38,43.75 D5.1
  Bottom 0.15: v82.38,41.75 v82.38,26
PREVGL
  Top 0.15: 77.1,17.75 73.38,17.75 EPD_C11.1 | 77.1,17.75 77.5,17.75 | 77.65,17.75 78.67,17.75 79.12,17.3 J1.23 | 77.65,17.75 77.5,17.75 | 77.5,17.75 77.5,17.9 | 77.5,17.9 77.5,22.25 90.25,35 D4.2 | 77.1,17.75 77.25,17.9 77.5,17.9 | 77.65,17.75 77.5,17.9
RESE
  Top 0.15: 75.62,13.38 72,13.38 70.5,11.88 70,11.88 R3.1 | 75.62,13.38 88.8,13.38 89.12,13.7 89.12,14.88 J1.3 | 75.62,13.38 73.12,15.88 70,15.88 69.38,15.25 Q3.2
RESE'
  Top 0.15: R3.2 69.88,10.5 69.62,10.75 68.12,10.75 67.88,11 SJ1.2 67.88,11.12 R2.2
RESET  (via drill 0.3)
  Top 0.15: 52.75,108.8 52.75,107.62 C5.1 | 52.4,109.25 51,109.25 RESET_BUTTON.3 50.88,109.38 47.5,109.38 RESET_BUTTON.4 47.38,109.25 47,108.88 46.5,108.88 45.38,107.75 R_RESET.1 45.5,107.62 45.62,107.62 46.5,106.75 47.3,106.75 | 47.75,106.2 IC1.1 47.75,102.12 47.12,102.12 v46.88,101.88 | v10.62,44.25 10.5,44.25 10.5,43.12 U2.3
  Top 0.152: 47.3,106.75 47.75,106.3 47.75,106.2 | 52.4,109.25 52.75,108.9 52.75,108.8
  Bottom 0.15: v10.62,44.25 46.88,80.5 v46.88,101.88
RTC_RST
  Top 0.15: U2.16 23.25,60.5 23.25,59.6 23.48,59.38 80,59.38 82.12,61.5 82.12,61.88 U3.4
RX
  Top 0.15: U2.24 12.7,60.83 12.7,63.9 13.2,64.4 13.2,64.35 14.1,65.25 14.12,65.25 TP_RX.TP
SCK  (via drill 0.3)
  Top 0.15: v72.62,26.75 38.5,26.75 R6.1 38.38,26.88 38.38,29.12 D10.2 38.38,29.25 38.75,29.25 v40.38,30.88 | J1.13 84.12,15.8 84.1,15.8 83.85,16.05 83.62,15.83 v83.62,15.75 | J4.P5 6,91.5 5.75,91.25 5,91.25 3.88,90.12 3.88,77.12 TP_SCK.TP 3.88,77 v3.88,64 | v40.38,50.25 40.38,50.75 U1.6 | v12.25,46.5 14,44.75 14,43.12 14.25,43.12 U2.6 14.55,42.75 14.55,41.8 14.78,41.58 18.3,41.58 18.5,41.77 v18.5,41.88
  Bottom 0.15: v72.62,26.75 v83.62,15.75 | v40.38,50.25 v40.38,30.88 38.5,29 31.38,29 v18.5,41.88 | v3.88,64 11.25,56.62 11.25,47.5 v12.25,46.5
SCL  (via drill 0.3)
  Top 0.15: 161.62,10.88 161.62,4.88 160.88,4.12 R2-PINH.1 | 161.62,10.88 160.25,10.88 SENSOR2.4 | v135.38,44 133.88,44 U4.7 | v158.5,20.88 165.43,20.88 J3.4 165.55,20.75 165.7,20.75 | 161.62,10.88 165.88,15.12 | 85.75,53.38 86,53.12 86,52.62 U3.16 | 85.75,53.38 83.5,55.62 22.25,55.62 18.12,59.75 18.12,60.5 U2.20 | v87.5,54 86.88,53.38 85.75,53.38
  Top 0.152: 165.88,15.12 166.38,15.63 166.38,20.18 165.8,20.75 165.7,20.75
  Bottom 0.15: v158.5,20.88 v135.38,44 132.87,46.51 121.43,46.51 113.93,54 v87.5,54
SDA  (via drill 0.3)
  Top 0.15: R1-PINH.1 159.8,3.82 159.8,2.4 159.55,2.15 157.22,2.15 155.62,3.75 155.62,11.6 | 156,12 158.88,12 | 158.88,12 159.38,11.5 SENSOR2.3 | v135.62,44.62 133.88,44.62 U4.8 | v160.38,19.88 165.43,19.88 J3.3 | 158.88,12 158.88,17.4 158.57,17.7 158.57,17.85 158.6,17.85 v159,18.25 | 88,54.12 86.12,56 23.88,56 20.88,59 19.68,59 19.38,59.3 19.38,60.5 U2.19 | 88,54.12 88,51.75 87.5,51.25 85.75,51.25 84.88,52.12 84.88,52.5 U3.15 | 88,54.12 v88.38,54.5
  Top 0.152: 155.62,11.6 156,11.97 156,12
  Bottom 0.15: v159,18.25 159,18.5 v160.38,19.88 v135.62,44.62 133.47,46.78 121.54,46.78 113.83,54.5 v88.38,54.5
SRC
  Top 0.15: 83.75,40.88 80.75,40.88 L1.1 80.62,41 79,41 79,43.75 D5.2 | 83.75,40.88 89.88,40.88 91.25,39.5 92.12,39.5 92.25,39.38 C4.2 | 83.75,40.88 83.75,32.38 68.75,17.38 Q3.3
SS_SD  (via drill 0.3)
  Top 0.15: 11.4,99.35 11.6,99.15 14.22,99.15 15,98.38 D8.2 | R10.1 10.51,100.34 11.4,99.45 11.4,99.35 | v11.75,48.12 11.75,43.12 U2.4 | v7.62,87.88 7.25,88.25 6.5,88.25 J4.P2 | 11.4,99.35 11.4,97.5 v11.38,97.5
  Bottom 0.15: v11.75,48.12 11.75,83.75 v7.62,87.88 6.89,88.61 6.89,93.18 7.14,93.43 7.3,93.43 v11.38,97.5
TX
  Top 0.15: U2.25 11.75,60.62 11.75,65.25 TP_TX.TP
USB_D+
  Top 0.15: D1.1 153.38,48.25 152.5,49.12 123.62,49.12 122.62,48.12 73.5,48.12 67.5,42.12 25.5,42.12 24.62,43 24.5,43 U2.14
USB_D-
  Top 0.15: D1.3 153.38,46.25 151.38,46.25 150.78,45.65 71.53,45.65 67.62,41.75 23.88,41.75 23.25,42.38 23.25,43 U2.13
VBAT
  Top 0.15: U4.2 131.88,44 131.88,43.62 U4.3 131.75,43.5 131,43.5 129.12,41.62 | 129.12,41.62 128.88,41.88 128.88,43 128.75,43 C2_BAT\.1 128.62,43.12 124.75,43.12 124.25,42.62 U5.3 | 129.12,41.62 130,40.75 | 130,40.75 130.12,40.62 Q1.3 130,40.75 | 130,40.75 133.62,40.75 136.75,43.88 TP_VBAT.TP
VBUS  (via drill 0.3)
  Top 0.3: v151.75,46.9 150.75,46.9 C4_USB.1 | v154.88,47.25 155.88,47.25 D1.5 156,47.25 157,47.25 157.5,47.75 157.5,48.38 C5_USB.1 | v151.88,45.75 151.88,40.12 PFMF.050.1.2 151.75,40 151.12,39.38 130.5,39.38 129.62,38.5 129.25,38.5 Q1.1 129.12,38.38 129.12,35.25 | 129.12,35.25 129.12,32 D2.2 | U5.4 121.5,42.5 119.62,42.5 CHG_LED.A 119.5,42.62 118.81,43.31 | 118.12,35.83 118.12,40.38 C1_BAT.1 118.12,40.5 113.88,41.2 113.88,43 114.25,43.38 118.75,43.38 118.81,43.31 | 118.12,35.83 118.12,35 113.88,30.75 R1_PWRUSB.2 | 118.81,43.31 v119,43.5 | 129.12,35.25 118.7,35.25 118.12,35.83 | TP_VBUS.TP 122.66,46.91 121.83,46.08 v121.25,46.08
  Bottom 0.3: 153,45.8 153.43,45.8 v154.88,47.25 | 153,45.8 152.85,45.8 v151.75,46.9 | v151.88,45.75 153,45.75 153,45.8 | v119,43.5 121.25,45.75 v121.25,46.08
VRTC
  Top 0.15: C10_SUPERCAP.2 92.5,51.38 92,50.88 89.88,50.88 R_CAPACITOR.1 89.75,50.75 87.12,50.75 86.88,50.5 C8.1 86.75,50.38 86.75,50.12 86.12,49.5 84.1,49.5 83.5,50.1 83.5,52.5 U3.14
VUSB
  Top 0.3: J2.A4 164.62,51.88 164.62,52.12 J2.B9 | J2.A9 164.62,56.88 164.62,56.75 J2.B4 164.75,56.62 165.5,56.62 165.62,56.5 166,56.5 166,52.88 165.25,52.12 164.75,52.12 J2.B9 | J2.B9 164.5,52 163.75,52 156.75,45 156.75,40.12 156.38,40.12 PFMF.050.1.1